# Altium PCB multivibrator_step.PcbDoc
Units mm, origin at the board's own origin, x right, y up, seen from the top; angles counter-clockwise.
Board outline 50.8 x 50.8 mm, 2 copper layers (Top Layer, Bottom Layer), stack 1 mm thick; 9 components, 6 nets, 20 pads, 0 vias.
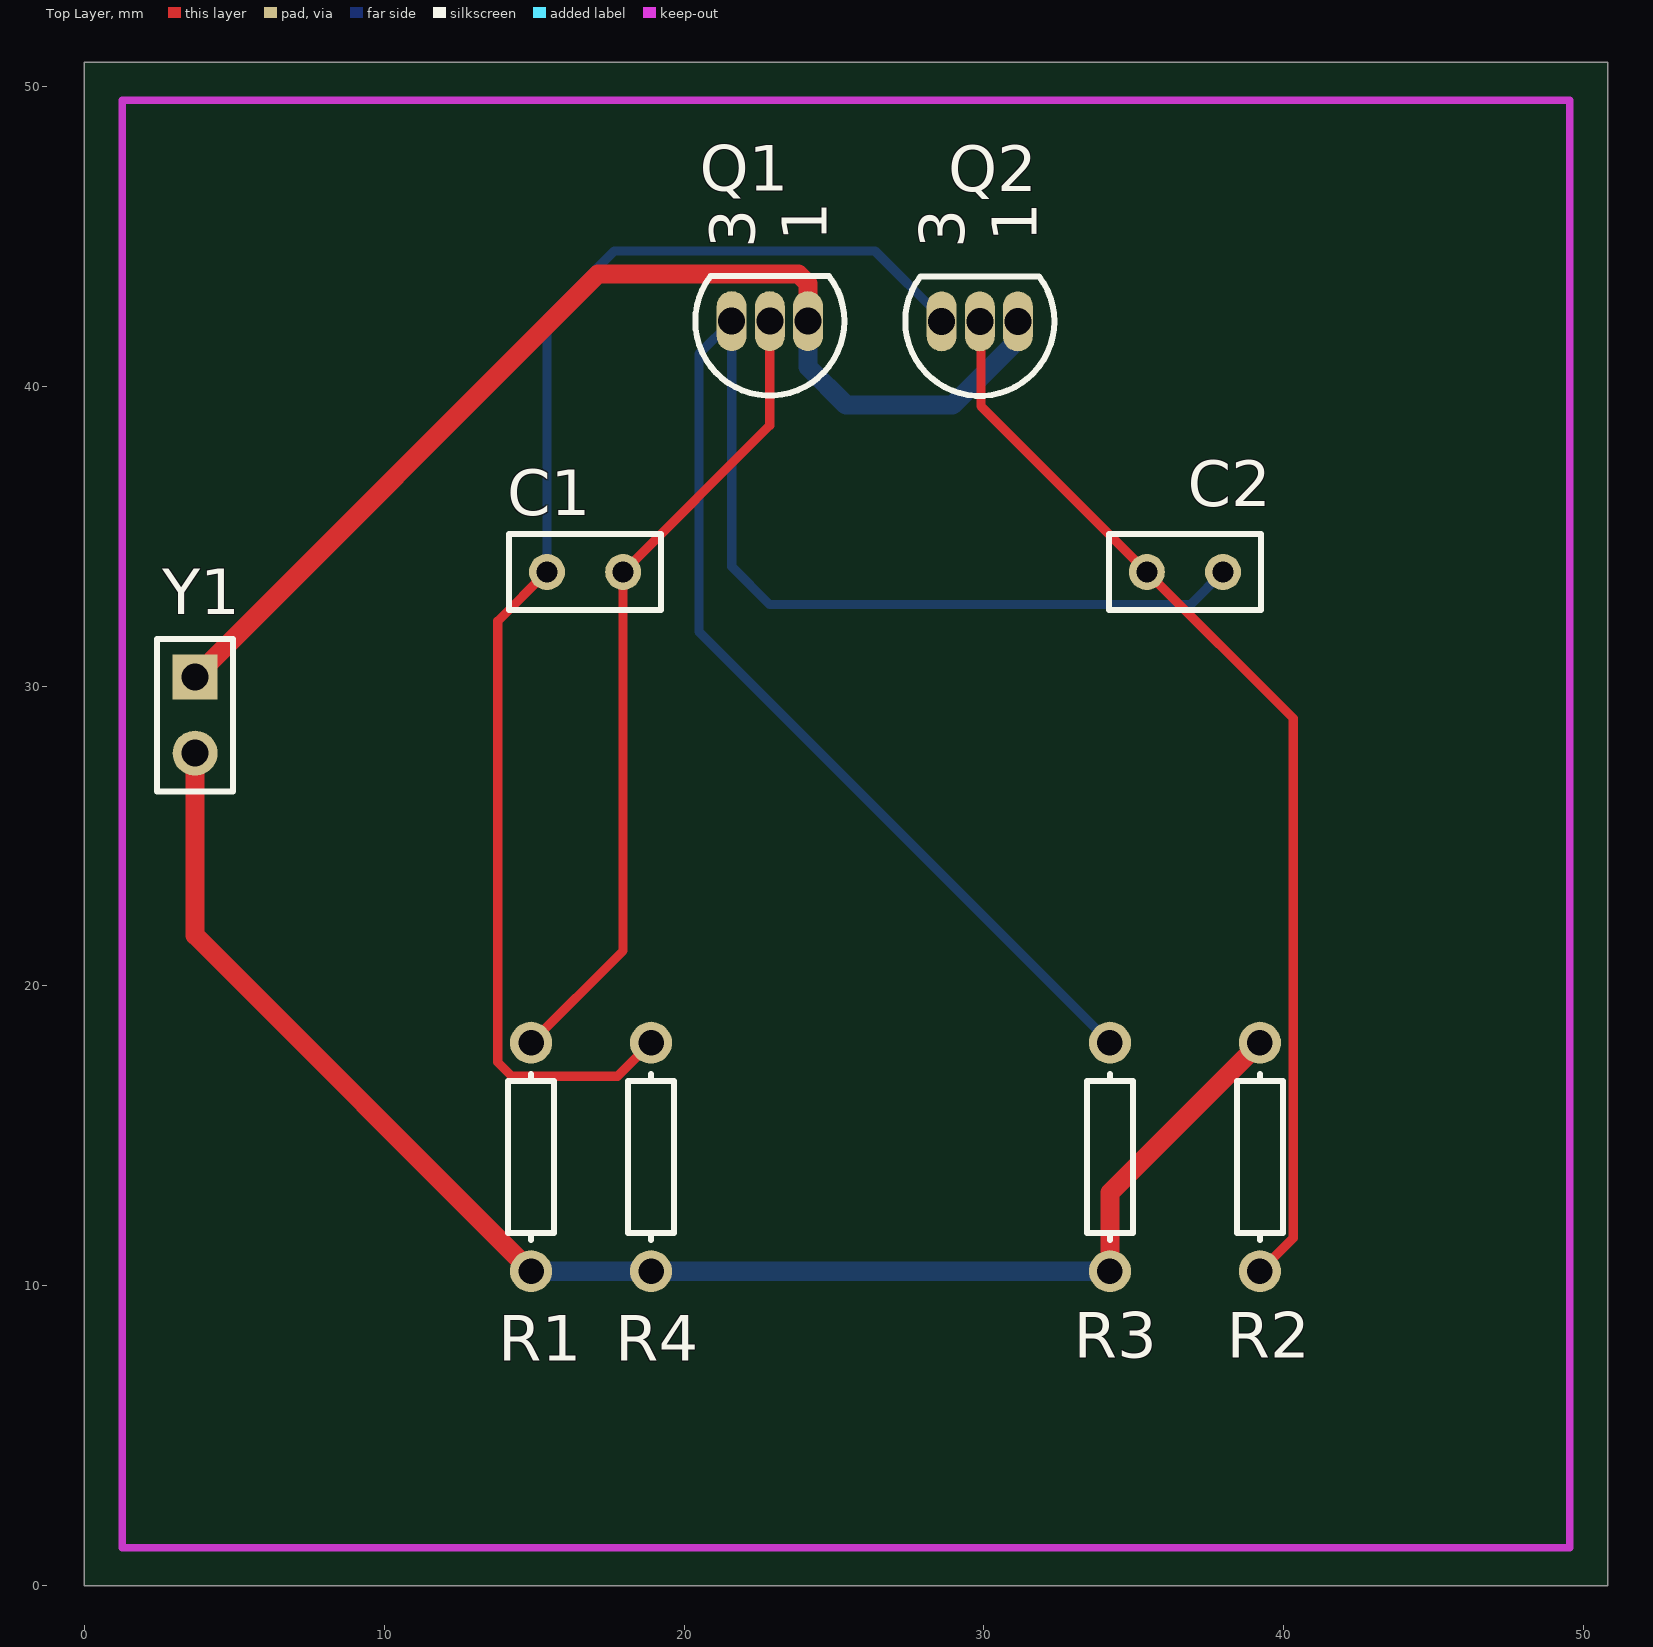
[diagram p0: Top Layer view]
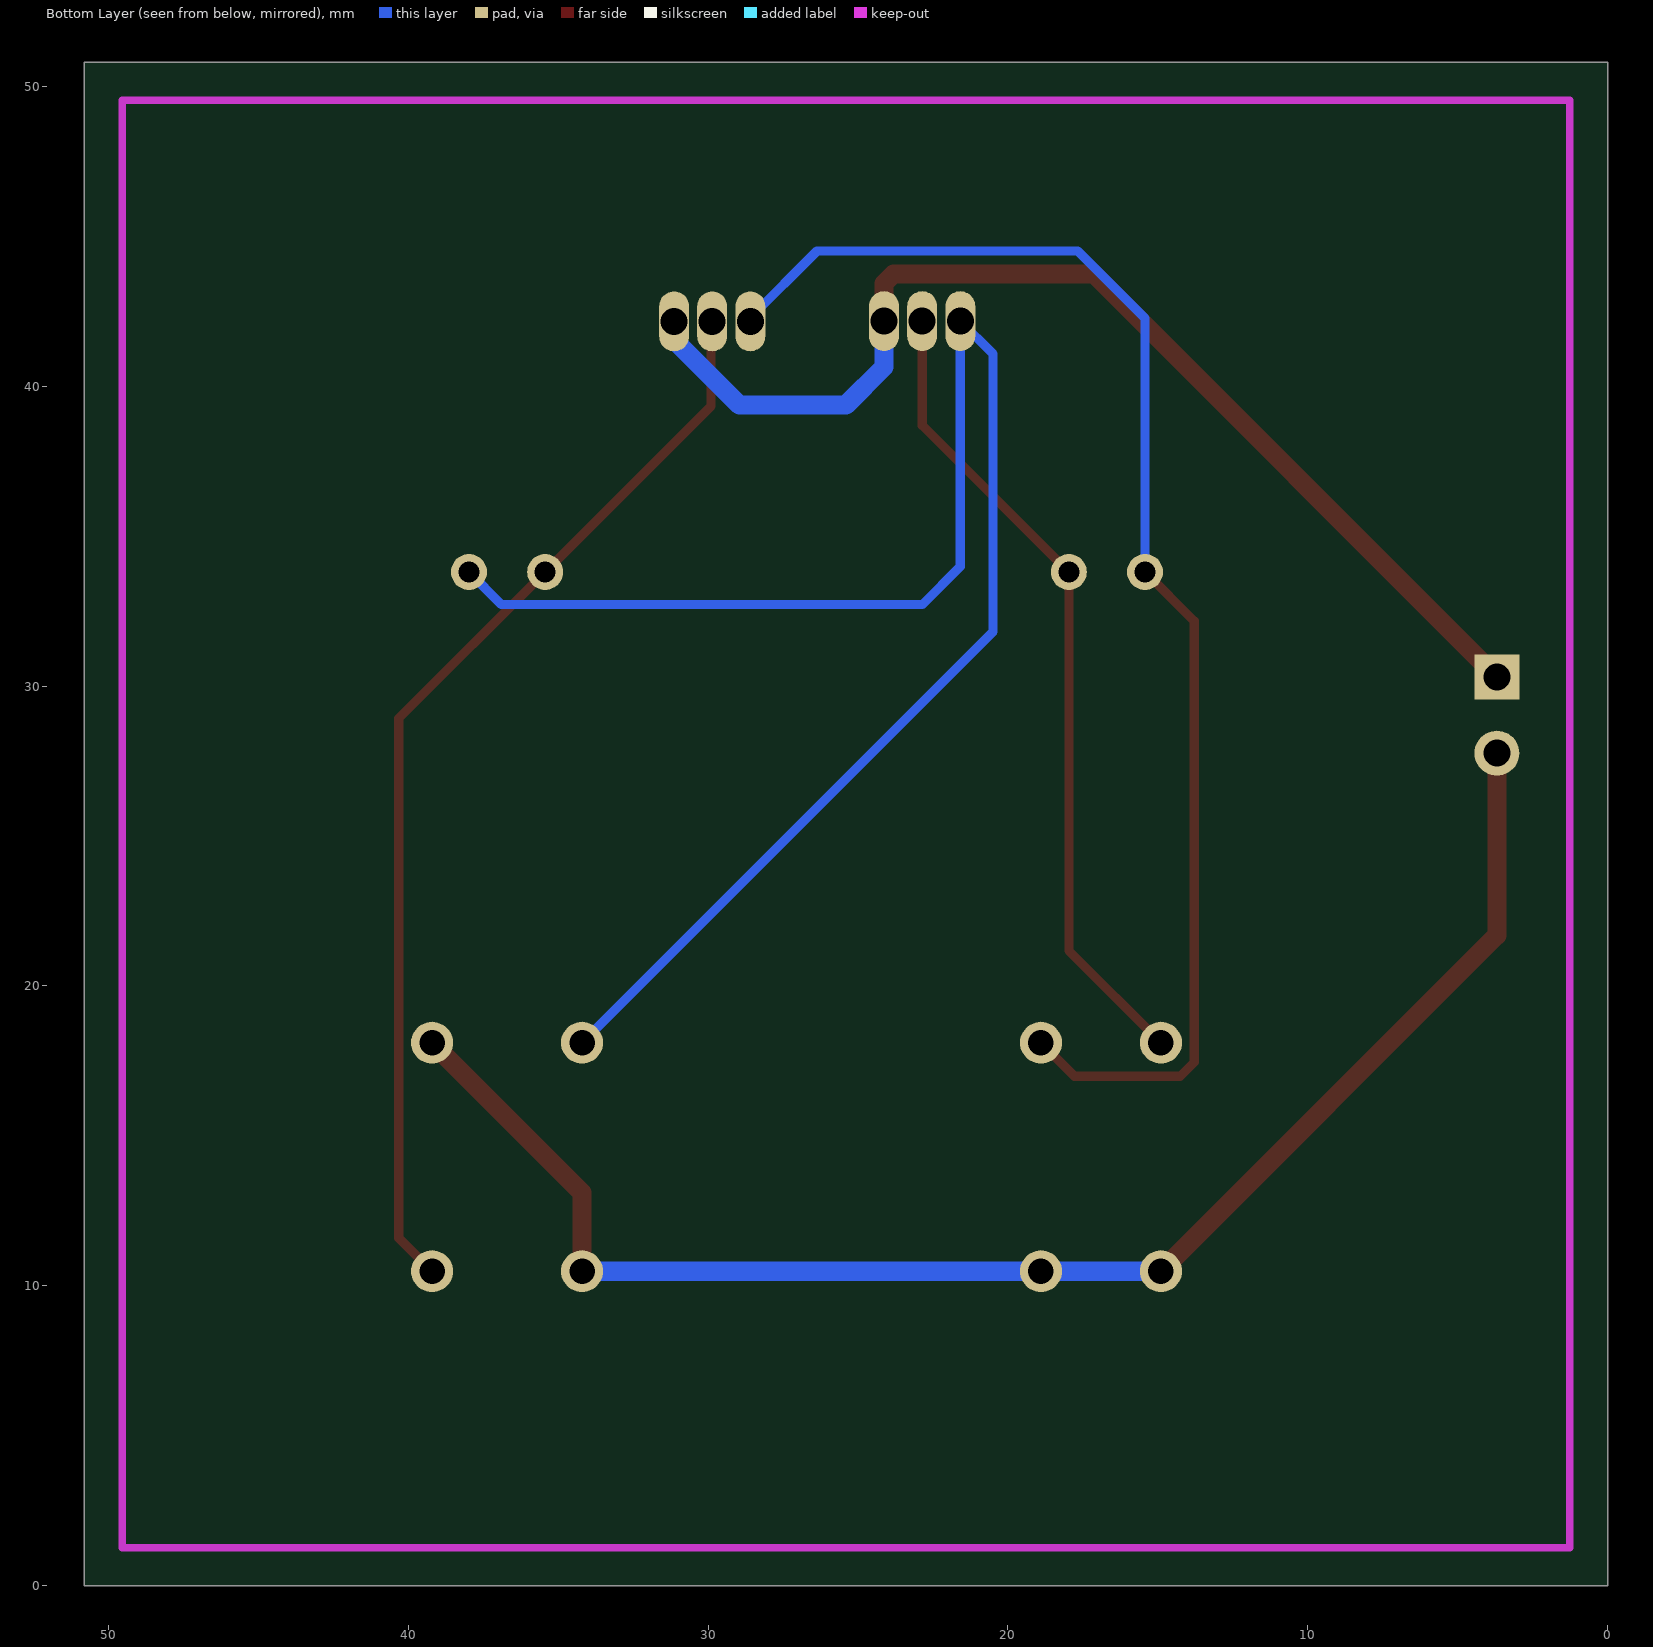
[diagram p1: Bottom Layer view, seen from below]

## Layer stack, top to bottom
Top Layer: signal copper 0.0356
Dielectric: core 0.9289, FR-4, Dk 4.8
Bottom Layer: signal copper 0.0356

## Board outline
0,0 50.8,0 50.8,50.8 0,50.8

## Design rules (kind name [scope] priority, off if disabled: settings)
Clearance [All] p1: gap=0.254
FabricationTestPointUsage TestPointUsage [All] p1: valid=0 allowmultiple=FALSE
FabricationTestpoint Testpoint [All] p1: side=3 testpointundercomponent=TRUE minsize=1.016 maxsize=2.54 preferedsize=1.524 minholesize=0 maxholesize=1.016 preferedholesize=0.813 testpointgrid=0.025 allowsidetop=TRUE allowsidebottom=TRUE usegrid=TRUE gridtolerance=0
PolygonConnect [All] p1: connectstyle=Relief reliefconductorwidth=0.254 reliefentries=4 polygonreliefangle="90 Angle"
RoutingVias [All] p1: holewidth=0.813 width=1.575 viastyle="Through Hole" minholewidth=0.711 minwidth=1.27 maxholewidth=0.711 maxwidth=1.27
SilkscreenOverComponentPads [All] p1: minsilkscreentomaskgap=0.254
SolderMaskExpansion [All] p1: expansion=0.102
Width "12V or GND" [InNet('12V') OR InNet('GND')] p1: maxlimit=0.635 minlimit=0.635 preferedwidth=0.635
Width [All] p2: maxlimit=0.305 minlimit=0.305 preferedwidth=0.305
25 further rules are at their usual default settings.

## Components (designator, comment, footprint, x,y, rotation, side; value= is the part's Value field where it differs from the comment)
C1 "20n" RAD-0.1 16.7,33.8 r180 top
C2 "20n" RAD-0.1 36.7,33.8 r180 top
Q1 "2N3904" TO-92A 22.86,42.164 r90 top
Q2 "2N3904" TO-92A 29.86,42.157 r90 top
R1 "100k" AXIAL-0.3 14.9,14.3 r270 top
R2 "100k" AXIAL-0.3 39.2,14.3 r90 top
R3 "1k" AXIAL-0.3 34.2,14.3 r270 top
R4 "1k" AXIAL-0.3 18.9,14.3 r270 top
Y1 "Header 2" HDR1X2 3.7,30.3 r270 top

## Footprints (in the part's own frame and the unit in brackets; to place one, negate y for a bottom-side part, rotate by r counter-clockwise, add the part's x,y. Pads: shape width x height; smd on the part's side, far side on the other; paste and mask are expansions set on the pad)
AXIAL-0.3 [mm] "Resistor; 2 Leads"
  round 1.4 hole 0.85: 1(-3.81,0) 2(3.81,0)
  silkscreen extent -2.77,-0.76 2.77,0.76, body extent -4.1,-0.75 4.13,0.77, height 1.77
HDR1X2 [mm] "Connector; Header; 2 Position"
  rect 1.5x1.5 hole 0.9: 1(0,0)
  round 1.5 hole 0.9: 2(2.54,0)
  silkscreen extent -1.27,-1.27 3.81,1.27, body extent -1.2,-1.25 3.74,1.25, height 7.83
RAD-0.1 [mm] "Indicating Instrument; 2 Leads"
  round 1.2 hole 0.7: 1(-1.27,0) 2(1.27,0)
  silkscreen extent -2.54,-1.27 2.54,1.27, body extent -2,-0.51 2,0.49, height 4.98
TO-92A [mm] "TO, Flat Index; 3 In-Line, Axial Leads; Body Dia. 4.5mm; Leads 0.51 x 0.48 mm (max)"
  oval 2x1 hole 0.9: 1(0,-1.27) 2(0,0) 3(0,1.27)
  silkscreen extent -2.48,-2.48 1.5,2.48, body extent -2.55,-2.55 1.53,2.55, height 5.36

## Part data
C1 C2: library part Cap, "Capacitor"
Q1 Q2: "NPN General Purpose Amplifier"
R1 R2 R3 R4: library part Res1, "Resistor"
Y1: "Header, 2-Pin"

## Nets (pads, with @x,y where several pads share a name; then routed paths per layer and width w, separated by ;. In a path a pad name is that pad's centre, name@x,y a point inside that pad or via, vN(x,y) a via of type N, cw(c..) or ccw(c..) an arc to the next point about the centre after c; other vN are vias at no path point)
12V: R1.2 R2.2 R3.2 R4.2 Y1.2 | length 50.9
  Top Layer w0.635: Y1.2 3.7,21.69 R1.2 ; R3.2 34.2,13.11 R2.2
  Bottom Layer w0.635: R1.2 R4.2 R3.2
GND: Q1.1 Q2.1 Y1.1 | length 37.9
  Top Layer w0.635: Y1.1 17.139,43.739 23.812,43.739 24.13,43.421 Q1.1
  Bottom Layer w0.635: Q1.1 24.13,40.64 25.4,39.37 28.956,39.37 31.1,41.514 Q2.1@31.1,42.164
NetC1_1: C1.1 Q1.2 R1.1 | length 27.4
  Top Layer w0.305: R1.1 17.97,21.18 C1.1 22.86,38.69 Q1.2
NetC1_2: C1.2 Q2.3 R4.1 | length 46.4
  Top Layer w0.305: C1.2 13.792,32.162 13.792,17.462 14.262,16.993 17.783,16.993 R4.1
  Bottom Layer w0.305: C1.2 15.43,42.252 17.678,44.501 26.365,44.501 28.59,42.276 Q2.3@28.59,42.164
NetC2_1: C2.1 Q1.3 R3.1 | length 55.7
  Bottom Layer w0.305: R3.1 20.5,31.81 20.5,41.074 Q1.3 21.59,33.985 22.86,32.715 36.885,32.715 C2.1
NetC2_2: C2.2 Q2.2 R2.1 | length 36.4
  Top Layer w0.305: Q2.2@29.9,42.164 29.9,39.33 C2.2 40.31,28.92 40.31,11.6 R2.1

## Keep-outs
Keep-Out Layer:
  lines w0.254: 1.27,1.27 1.27,49.53 49.53,49.53 49.53,1.27 1.27,1.27

## Text inside footprints (layer, text, board x,y; h text height)
Q1: Top Overlay "1" at 24.76,44.824 h1.5 r90; Top Overlay "3" at 22.35,44.594 h1.5 r90
Q2: Top Overlay "3" at 29.35,44.587 h1.5 r90; Top Overlay "1" at 31.76,44.817 h1.5 r90